# Altium PCB DIOT_Sampler 20spacin.PCBDOC (part 7 of 8)
Units mm, origin at the board's own origin, x right, y up, seen from the top; angles counter-clockwise.
Board outline 222.37 x 100 mm, 4 copper layers (Top, GP1(GND), L3, Bot), stack 1.648 mm thick; 680 components, 424 nets, 2212 pads, 808 vias.
Unrouted connection lines stored in the file: 327.
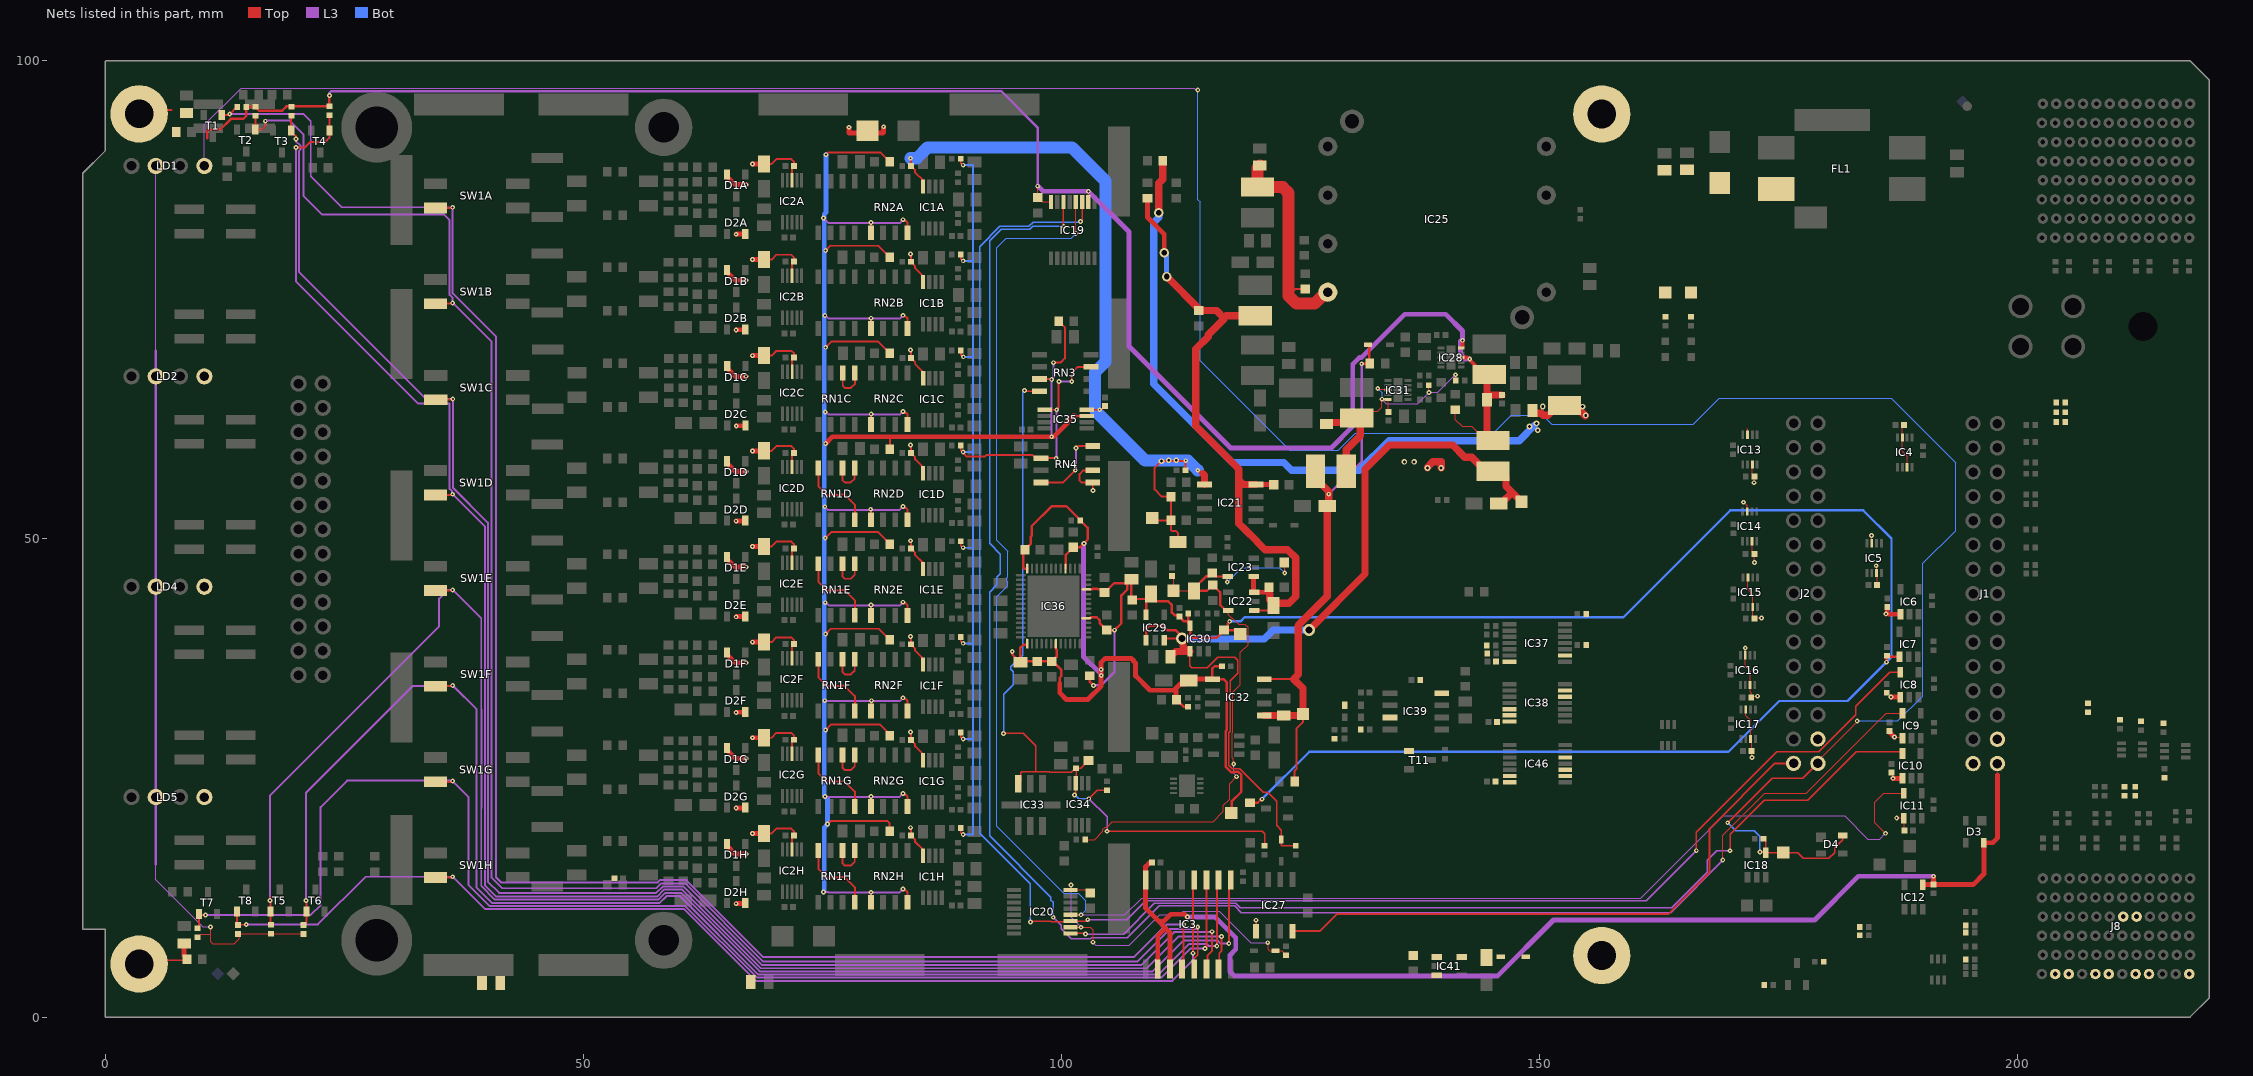
[diagram p8: the nets of this part, all layers, seen from the top]

## Via types
v1: diameter 0.5, hole 0.2, Top to Bot, tented both sides, 765 vias
v2: diameter 0.6, hole 0.3, Top to Bot, tented both sides, 17 vias
v3: diameter 0.5, hole 0.2, Top to Bot, 11 vias
v4: diameter 1, hole 0.6, Top to Bot, tented both sides, 7 vias
v5: diameter 0.6, hole 0.3, Top to Bot, 6 vias
v6: diameter 1.27, hole 0.711, Top to Bot, 2 vias

## Nets (pads, with @x,y where several pads share a name; then routed paths per layer and width w, separated by ;. In a path a pad name is that pad's centre, name@x,y a point inside that pad or via, vN(x,y) a via of type N, cw(c..) or ccw(c..) an arc to the next point about the centre after c; other vN are vias at no path point) (continued)
NetRN1C_5: RN1C.5 RN1C.6 | length 4
  Top w0.203: RN1C.6@77.141,67.363 77.141,66.022 77.377,65.786 78.002,65.786 78.411,66.196 RN1C.5@78.411,67.363
NetRN1D_4: RN1D.4 RN1D.8 | length 8.1
  Top w0.203: RN1D.8@74.594,57.31 74.594,55.515 75.499,54.61 76.867,54.61 76.916,54.659 77.312,54.659 78.404,53.567 RN1D.4@78.404,51.91
NetRN1D_5: RN1D.5 RN1D.6 | length 4
  Top w0.203: RN1D.6@77.114,57.48 77.114,56.138 77.35,55.903 77.975,55.903 78.384,56.312 RN1D.5@78.384,57.48
NetRN1E_4: RN1E.4 RN1E.8 | length 8.1
  Top w0.203: RN1E.8@74.594,47.31 74.594,45.515 75.499,44.61 76.867,44.61 76.916,44.659 77.312,44.659 78.404,43.567 RN1E.4@78.404,41.91
NetRN1E_5: RN1E.5 RN1E.6 | length 4
  Top w0.203: RN1E.6@77.128,47.407 77.128,46.066 77.364,45.83 77.989,45.83 78.398,46.239 RN1E.5@78.398,47.407
NetRN1F_4: RN1F.4 RN1F.8 | length 8.1
  Top w0.203: RN1F.8@74.594,37.31 74.594,35.515 75.499,34.61 76.867,34.61 76.916,34.659 77.312,34.659 78.404,33.567 RN1F.4@78.404,31.91
NetRN1F_5: RN1F.5 RN1F.6 | length 4
  Top w0.203: RN1F.6@77.128,37.407 77.128,36.066 77.364,35.83 77.989,35.83 78.398,36.239 RN1F.5@78.398,37.407
NetRN1G_4: RN1G.4 RN1G.8 | length 8.1
  Top w0.203: RN1G.8@74.594,27.31 74.594,25.515 75.499,24.61 76.867,24.61 76.916,24.659 77.312,24.659 78.404,23.567 RN1G.4@78.404,21.91
NetRN1G_5: RN1G.5 RN1G.6 | length 4
  Top w0.203: RN1G.6@77.128,27.407 77.128,26.066 77.364,25.83 77.989,25.83 78.398,26.239 RN1G.5@78.398,27.407
NetRN1H_4: RN1H.4 RN1H.8 | length 8.1
  Top w0.203: RN1H.8@74.594,17.31 74.594,15.515 75.499,14.61 76.867,14.61 76.916,14.659 77.312,14.659 78.404,13.567 RN1H.4@78.404,11.91
NetRN1H_5: RN1H.5 RN1H.6 | length 4
  Top w0.203: RN1H.6@77.128,17.407 77.128,16.066 77.364,15.83 77.989,15.83 78.398,16.239 RN1H.5@78.398,17.407
NetRN4_1: RN4.1 RN4.2 | length 4.5
  Top w0.203: RN4.2@103.289,57.17 102.304,57.17 101.914,56.78 101.914,56.08 102.094,55.9 RN4.1@103.289,55.9 103.289,55.08 v1(103.314,55.055)
NetRN4_4: RN4.4 RN4.8 | length 8.3
  Top w0.203: RN4.8@97.889,55.9 100.184,55.9 v1(101.464,57.18) ; v1(101.539,59.505) 101.744,59.71 RN4.4@103.289,59.71
  L3 w0.203: v1(101.464,57.18) 101.539,57.255 v1(101.539,59.505)
P2V5A: C16.2 C71.2 C75.2 C76.2 C77.1 C92.2 C93.2 C94.2 IC7.1 IC29.5 IC30.5 IC36.31 IC36.37 R70.2 R76.1 R77.1 TP10.1 | length 207.6
  Top w0.254: IC36.31@102.609,41.715 102.964,41.715 103.06,41.811 103.703,41.811 103.998,41.516 103.998,41.221 C93.2@104.764,40.455 v1(105.564,40.455) 106.283,41.174 106.283,44.09 106.899,44.705 C94.2@106.899,45.357 ; IC36.37@102.609,44.715 103.25,44.715 103.33,44.796 103.748,44.796 103.828,44.715 104.179,44.715 C92.2@104.514,44.38 104.539,44.38 105.516,45.357 C94.2@106.899,45.357 ; R77.1@102.964,35.705 102.964,35.08 v1(103.364,34.68) ; IC29.5@108.864,42.082 108.864,43.446 C77.1@109.387,43.969 ; R70.2@113.294,42.18 IC30.5@113.294,41.38 ; v1(117.602,41.38) 117.602,41.313 117.387,41.098 117.387,40.803 C75.2@117.039,40.455 ; TP10.1@118.706,40.07 118.321,40.455 C75.2@117.039,40.455 ; R76.1@119.729,22.414 120.544,22.414 120.916,22.786 v1(120.982,22.786) ; v1(186.29,37.112) 186.333,37.154 C16.2@186.333,37.784 186.418,37.698 IC7.1@187.657,37.698 ; C94.2@106.899,45.357 C94.2@107.322,45.78 107.322,43.715 108.889,43.715 109.387,44.213 C77.1@109.387,44.244 C77.1@109.387,43.969 ; C77.1@109.387,43.969 109.885,43.471 111.187,43.471 111.568,43.091 111.568,42.299 111.843,42.024 112.189,42.024 C76.2@112.341,41.872 112.833,41.38 IC30.5@113.294,41.38 ; IC30.5@113.294,41.38 113.294,41.1 IC30.5@113.465,40.929 113.465,39.979 113.764,39.68 116.264,39.68 C75.2@117.039,40.455
  L3 w0.254: v1(103.364,34.68) 104.164,34.68 105.564,36.08 v1(105.564,40.455)
  Bot w0.254: v1(117.602,41.38) 118.739,41.38 119.164,41.805 158.78,41.805 169.955,52.98 183.858,52.98 186.81,50.027 186.81,37.632 v1(186.29,37.112) 182.226,33.047 175.077,33.047 169.766,27.737 125.933,27.737 v1(120.982,22.786)
P3V3: C17.2 C18.2 C19.2 C20.2 C21.2 C22.2 C23.2 C25.2 C26.2 C27.2 C28.2 C29.2 C30.2 C32.2 C33.2 C69.2 C70.2 C123.2 D9.1 IC4.3 IC4.7 IC5.3 IC5.7 IC6.1 IC8.1 IC9.1 IC10.1 IC11.1 IC13.3 IC13.7 IC14.3 IC14.7 IC15.3 IC15.7 IC16.3 IC16.7 IC17.3 IC17.7 IC19.10 IC19.16 IC20.10 IC20.16 IC27.5 IC28.8 IC28.10 IC46.14 L7.2 L8.1 LD1.2 LD1.4 LD2.2 LD2.4 LD3.2 LD4.2 LD4.4 LD5.2 LD5.4 R25.1 R27.1 R29.1 R31.1 R33.1 R36.1 R39.1 R43.1 R65.1 R66.2 R119.2 TP15.1 | length 374.6
  Top w0.127: R39.1@9.764,8.46 9.984,8.68 11.064,8.68 ; v1(11.014,9.43) 11.064,9.38 11.064,8.68 ; R36.1@20.764,8.71 14.014,8.71 14.014,8.18 13.514,7.68 11.264,7.68 11.064,7.88 11.064,8.68 ; v1(97.527,86.886) C32.2@97.527,85.686 97.966,85.247 IC19.16@98.924,85.247 ; IC20.10@100.969,9.387 v1(102.071,9.387) 103.007,9.387 103.339,9.055 103.339,7.855 v1(103.314,7.83) ; v1(101.014,13.812) 101.014,13.332 IC20.16@100.969,13.287 102.707,13.287 C33.2@103.014,12.98 ; IC19.10@102.824,85.247 v1(102.824,86.349) ; v1(121.589,7.78) 121.629,7.74 121.629,7.065 121.764,6.93 D9.1@122.404,6.93 123.044,6.93 R65.1@123.514,6.46 ; R66.2@141.647,63.133 141.261,63.52 R66.2@141.211,63.52 141.211,62.459 141.915,61.755 142.914,61.755 144.391,60.279 145.137,60.279 L8.1@145.141,60.279 ; v1(171.336,53.831) 171.726,53.441 IC14.7@171.726,52.851 ; v1(171.516,38.596) IC16.7@171.516,37.838 171.512,37.834 171.512,36.67 172.016,36.166 IC16.3@172.016,34.738 172.016,34.013 172.144,33.885 C25.2@172.144,33.434 172.261,33.551 v1(172.802,33.551) ; IC17.7@171.571,32.166 171.571,31.516 172.071,31.016 IC17.3@172.071,29.066 172.188,28.949 C27.2@172.188,27.838 172.188,27.174 v1(172.221,27.141) ; 171.676,61.589 171.76,61.505 IC13.7@171.76,60.889 ; IC15.7@171.802,45.976 171.798,45.972 171.798,44.731 172.302,44.227 IC15.3@172.302,42.876 172.302,41.841 C26.2@172.469,41.673 172.528,41.731 v1(173.227,41.731) ; IC14.3@172.226,49.751 172.226,48.66 C30.2@172.464,48.421 172.478,48.407 v1(172.478,47.537) ; IC13.3@172.26,57.789 172.26,56.738 C28.2@172.474,56.524 172.474,55.931 v1(172.426,55.883) ; IC5.7@184.75,49.543 v1@184.75,50.364 ; v1(185.212,47.193) 185.25,47.155 IC5.3@185.25,46.443 185.318,46.375 C22.2@185.318,45.18 ; C19.2@186.805,25.555 186.965,25.715 v1(186.965,24.962) ; v1(187.112,29.271) 187.836,29.271 IC9.1@187.962,29.146 IC9.1@187.917,29.101 ; v1(187.354,20.821) 188.05,20.821 IC11.1@188.085,20.786 188.167,20.704 C18.2@188.167,19.487 ; C23.2@187.95,61.716 IC4.3@187.95,60.598 187.95,59.15 188.45,58.65 IC4.7@188.45,57.498
  Top w0.152: IC27.5@120.359,8.98 120.364,8.985 v1(120.364,10.13)
  Top w0.254: 10.685,91.879 10.685,92.66 10.834,92.809 12.046,92.809 13.163,93.926 14.46,93.926 14.789,94.255 14.789,95.125 R25.1@14.759,95.155 ; R25.1@14.759,95.175 R27.1@15.714,95.175 16.11,94.779 18.513,94.779 18.959,95.225 R31.1@23.464,95.225 v1(23.464,96.355)
  Top w0.381: IC28.8@141.812,68.965 142.455,68.965 ; IC28.10@141.812,69.965 141.948,70.1 v1(141.948,70.765) ; v1@142.655,68.765 144.235,67.185 L7.2@144.735,67.185
  Top w0.508: v1(186.24,42.162) v1@186.365,42.287 ; C17.2@186.365,42.862 v1@186.365,42.287 ; C20.2@186.615,29.912 186.615,29.767 v1(187.112,29.271) ; v1(186.77,33.458) IC8.1@187.725,33.458 ; v1(186.965,24.962) 186.968,24.959 IC10.1@187.95,24.959 ; IC6.1@187.743,42.122 186.53,42.122 v1@186.365,42.287
  Top w0.762: v2(138.296,57.422) 138.296,57.5 138.85,58.055 139.719,58.055 v2(139.719,57.422) ; L7.2@144.735,67.185 144.518,66.967 C70.2@144.518,64.568 ; L8.1@145.137,60.279 144.518,60.898 C70.2@144.518,64.568 ; L8.1@145.141,60.279 L8.1@145.891,60.279 ; C69.2@146.082,65.044 144.993,65.044 C70.2@144.518,64.568
  L3 w0.127: 5.304,15.97 5.304,14.359 10.233,9.43 v1(11.014,9.43) ; 5.304,69.68 LD1.2@5.304,89.68 ; v1(101.014,13.812) 101.014,10.534 100.969,10.489 v1(102.071,9.387) ; v1(103.314,7.83) 103.62,7.524 107.093,7.524 110.271,10.703 112.358,10.703 112.736,11.08 116.489,11.08 119.789,7.78 v1(121.589,7.78)
  L3 w0.254: 5.304,15.97 LD5.2@5.304,23 5.304,69.68 ; v1(23.464,96.355) 23.464,96.63 23.657,96.823 93.721,96.823 97.527,93.017 v1(97.527,86.886)
  L3 w0.508: v1@97.542,86.902 98.095,86.349 v1(102.824,86.349) 107.083,82.09 107.083,70.119 117.697,59.505 128.214,59.505 130.48,61.771 130.48,68.281 131.149,68.951 131.379,68.951 135.913,73.485 140.201,73.485 141.948,71.737 v1(141.948,70.765) ; v1@141.751,70.728 141.751,69.303 142.227,68.827 142.703,68.827 v1(142.711,68.82)
  other v1: 184.71,50.364
  other v2: 135.869,58.055 136.898,58.055
P3V3_DIOT: C107.2 C108.2 C110.2 C118.1 D17.2 IC37.2 IC37.14 IC38.14 IC39.8 IC41.5 R102.2 R103.2 R104.1 R107.1 R109.1 R110.1 R113.1
P3V3_MP: C113.2 C119.2 C120.2 D17.1 IC40.8 IC42.8 IC43.8 J1.30 R114.2 R115.2
P3V3_MP0: C15.2 C24.2 D3.4 IC3.2 IC3.3 IC3.16 IC12.4 | length 128
  Top w0.508: C15.2@109.489,16.18 109.271,16.18 108.819,15.728 IC3.16@108.819,14.33 108.819,11.375 110.189,10.005 ; IC3.2@110.089,5.03 110.089,8.505 110.889,9.305 ; IC3.3@111.359,5.03 111.359,8.835 110.889,9.305 ; v1(113.189,10.455) 112.889,10.755 111.464,10.755 110.714,10.005 110.189,10.005 ; IC12.4@190.123,13.556 190.077,13.602 IC12.4@190.077,13.852 190.08,13.848 C24.2@191.21,13.848 ; v1(191.21,14.72) C24.2@191.21,13.848 ; 197.882,25.319 197.882,18.695 197.413,18.225 D3.4@196.471,18.225 196.471,14.959 195.359,13.848 C24.2@191.21,13.848 ; 110.189,10.005 110.889,9.305
  L3 w0.508: v1(113.189,10.455) 116.089,10.455 118.239,8.305 118.239,7.08 117.639,6.48 117.639,4.755 118.114,4.28 145.6,4.28 151.47,10.15 178.77,10.15 183.34,14.72 v1(191.21,14.72)
P3V3_MP1: C31.2 D4.4 IC18.4 LD3.4 TP5.1 | length 295.8
  Top w0.127: 179.112,26.526 179.112,26.754 183.22,30.863 v1(183.22,30.964)
  Top w0.152: v1(169.678,20.318) 174.319,24.959 177.545,24.959 179.112,26.526 ; v1(173.046,17.263) 173.6,17.263 IC18.4@173.664,17.198 ; C31.2@173.414,18.648 173.664,18.398 IC18.4@173.664,17.198 ; D4.4@181.737,18.995 181.737,18.527 180.859,17.649 180.859,17.205 180.241,16.587 177.601,16.587 177.01,17.178 173.684,17.178 IC18.4@173.664,17.198
  L3 w0.127: 10.384,89.68 10.384,93.3 14.225,97.141 113.902,97.141 114.03,97.012 114.205,97.012 v1(114.277,96.941)
  Bot w0.127: v1(114.277,96.941) 114.277,85.48 114.514,85.243 114.514,68.63 123.864,59.28 128.951,59.28 130.726,61.055 145.173,61.055 147.038,62.92 150.339,62.92 151.293,61.966 166.061,61.966 168.795,64.7 186.795,64.7 193.507,57.988 193.507,50.875 190.072,47.44 190.072,33.567 187.469,30.964 v1(183.22,30.964)
  Bot w0.152: v1(169.678,20.318) 170.509,19.487 172.453,19.487 173.046,18.894 v1(173.046,17.263)
P3V3_MP2: C121.2 C122.2 IC44.8 IC45.8 J2.30
P3V3A: C67.1 C68.2 D7.1 IC29.1 IC29.3 IC30.1 L8.2 R60.2 TP11.1 | length 98.2
  Top w0.152: IC30.1@113.465,38.229 113.439,38.204 113.439,36.744 113.653,36.53 115.265,36.53 116.365,37.63 118.139,37.63 118.439,37.33 118.439,35.97 117.647,35.178 117.647,29.885 117.511,29.748 117.511,26.353 117.893,25.97 118.657,25.97 121.119,23.509 121.56,23.509 122.51,22.559 122.51,20.034 123.014,19.53 D7.1@123.014,18.57 123.014,17.93 123.044,17.9 R60.2@124.514,17.9
  Top w0.254: IC29.1@108.864,39.382 108.864,40.544 109.251,40.931 110.607,40.931 111.108,40.43 111.995,40.43 112.629,39.796 v6(112.629,39.585) 110.912,39.585 110.764,39.437 IC29.3@110.764,39.382
  Top w0.762: C68.2@111.414,37.68 111.963,38.229 112.939,38.229 ; v6(112.629,39.585) 112.726,39.487 112.726,38.748 112.939,38.535 112.939,38.229 ; IC30.1@113.465,38.229 112.939,38.229 ; v6(125.915,40.482) 131.766,46.332 131.766,57.276 134.32,59.83 140.9,59.83 142.181,58.549 142.92,58.549 144.391,57.079 L8.2@145.141,57.079 145.891,57.079 146.51,56.46 146.51,55.498 147.128,54.88 ; C67.1@145.739,53.714 146.014,53.714 147.128,54.827 147.128,54.88 ; TP11.1@148.128,53.88 147.128,54.88
  Bot w0.762: v6(112.629,39.585) 112.684,39.53 121.211,39.53 122.163,40.482 v6(125.915,40.482)
P5V0A: C82.2 C83.2 C84.1 C87.2 C88.2 C89.2 C90.2 C91.2 IC32.1 IC36.15 IC36.21 IC36.44 IC36.52 R73.2 R78.2 TP13.1 | length 90.4
  Top w0.254: v1(94.864,38.23) 94.864,37.915 95.672,37.107 C91.2@95.725,37.107 ; C90.2@96.035,48.88 96.035,46.959 96.104,46.89 IC36.52@96.434,46.89 ; C90.2@96.189,48.88 96.814,49.505 96.814,50.23 96.914,50.33 96.914,51.33 99.014,53.43 100.514,53.43 101.984,51.96 R78.2@101.984,51.93 102.768,51.146 102.768,49.934 v1(102.366,49.532) 101.964,49.13 C88.2@101.264,49.13 100.464,48.33 100.464,46.92 IC36.44@100.434,46.89 ; IC36.15@96.434,39.04 96.324,38.93 96.014,38.93 95.725,38.641 C91.2@95.725,37.107 ; IC36.21@99.434,39.04 99.434,38.498 99.514,38.417 99.514,37.697 99.068,37.251 C87.2@99.002,37.185 ; 99.839,34.908 99.839,35.48 100.014,35.655 100.014,36.305 99.134,37.185 C87.2@99.002,37.185 ; C82.2@112.064,33.18 112.784,32.46 R73.2@113.264,32.46 ; C83.2@116.814,36.68 116.014,36.68 115.764,36.43 115.764,35.385 IC32.1@115.814,35.335 116.97,35.335 117.317,34.988 117.317,30.022 117.181,29.885 117.181,26.216 117.808,25.589 118.052,25.589 118.103,25.64 118.52,25.64 118.816,25.345 118.816,23.552 117.808,22.544 117.808,21.373 TP13.1@117.776,21.342 ; C91.2@95.725,37.107 95.803,37.185 C89.2@97.503,37.185 C87.2@99.002,37.185
  Top w0.508: 99.839,34.908 99.839,33.9 100.534,33.205 102.781,33.205 104.167,34.591 104.167,35.729 v1(104.167,36.337) 104.167,37.083 104.595,37.511 107.322,37.511 107.545,37.288 107.545,37.224 107.764,37.005 107.764,35.68 109.27,34.174 111.772,34.174 111.995,34.397 ; C82.2@112.064,33.18 111.995,33.249 111.995,34.174 111.995,34.397 ; IC32.1@115.814,35.335 113.469,35.335 112.943,34.809 112.407,34.809 111.995,34.397
  L3 w0.508: v1(102.366,49.532) 102.314,49.48 102.314,37.69 104.167,35.837 v1@104.167,35.68
  other v1: 104.177,35.729
P6V0: C78.2 C79.2 IC31.8 IC31.10 L9.2 L10.1 R69.2 R72.2 | length 28.2
  Top w0.127: L9.2@131.117,62.663 131.117,63.34 133.093,63.34 133.52,63.767 v1@133.52,64.529 ; v1(133.093,65.72) 133.164,65.648 133.799,65.648 133.811,65.637 133.811,65.605 134.126,65.605 IC31.8@134.161,65.57 ; v1@133.779,64.57 IC31.10@134.161,64.57 134.161,63.27 C78.2@134.211,63.27 ; R72.2@138.431,66.07 138.431,65.35 v1(138.461,65.32) ; v1(141.211,67.165) 141.241,67.135 R69.2@141.241,66.57
  Top w0.762: C79.2@127.731,62.02 127.875,62.164 130.265,62.164 L9.2@130.746,62.645 ; L10.1@129.796,57.08 129.796,59.329 131.264,60.797 131.264,62.479 L9.2@131.099,62.645
  L3 w0.127: v1@133.561,64.57 133.976,64.154 137.295,64.154 v1(138.461,65.32) 139.366,65.32 v1(141.211,67.165)
  Bot w0.127: v1(133.093,65.72) 133.546,65.267 v1(133.546,64.608)
P6V0A: C80.1 C81.2 D8.1 IC32.5 IC32.8 L10.2 R53.2 R64.2 TP12.1 | length 60
  Top w0.203: IC32.8@121.214,35.335 124.08,35.335 ; R53.2@124.389,24.63 124.389,25.73 124.589,25.93 124.589,30.155 125.264,30.83 TP12.1@125.264,31.68
  Top w0.254: v1(131.411,68.32) R64.2@132.218,68.32 ; D8.1@132.071,70.32 132.115,70.32 132.218,70.217 132.218,68.388 R64.2@132.261,68.345
  Top w0.762: IC32.5@121.214,31.525 C81.2@123.264,31.525 ; C81.2@123.264,31.53 C81.2@123.264,31.525 ; L10.2@126.596,57.08 126.596,56.324 127.964,54.956 v1(127.964,54.68) 127.964,53.58 C80.1@127.814,53.43 ; C80.1@127.814,53.186 127.814,43.997 124.772,40.955 124.772,35.81 124.297,35.335 125.264,34.368 TP12.1@125.264,31.68 125.109,31.525 C81.2@123.264,31.525
  L3 w0.254: v1(127.964,54.68) 131.411,58.127 v1(131.411,68.32)
P12V0: C57.2 C114.2 C115.2 D16.1 FL1.2 IC27.8 J1.28 J1.29 J2.28 J2.29 L4.1 R45.2 R100.2 R118.2 R154.2 R155.2 R156.2 TP14.1 | length 138.3
  Top w0.203: IC27.8@124.169,8.98 127.025,8.98 128.815,10.77 163.45,10.77 167.8,15.12 167.8,19.7 174.626,26.526 J2.29@176.572,26.526
  Top w0.762: v4(110.189,84.105) 110.189,87.18 110.614,87.605 R45.2@110.614,89.53 ; C57.2@149.274,63.422 149.274,63.286 149.418,63.142 150.18,63.142 150.405,62.917 150.902,62.917 151.249,63.263 151.249,63.326 151.868,63.945 L4.1@152.618,63.945 153.718,63.945 v2@154.793,62.87
  Bot w0.762: v4(110.189,84.105) 110.189,83.605 109.664,83.08 109.664,66.205 117.889,57.98 123.264,57.98 124.064,57.18 131.164,57.18 134.263,60.279 147.888,60.279 149.464,61.855
  other v2: 149.814,61.355 148.964,61.755 149.689,62.08 154.843,62.92 154.489,63.83 150.339,63.855
P12V0_DIOT: C117.2 IC41.1 IC41.3 J8.A1 J8.D1 J8.E1 J8.G1 J8.H1 J8.J1 J8.K1 R100.1 R154.1 R155.1 R156.1
P12V0A: C8A.1 C8B.1 C8C.1 C8D.1 C8E.1 C8F.1 C8G.1 C8H.1 C9A.2 C9B.2 C9C.2 C9D.2 C9E.2 C9F.2 C9G.2 C9H.2 C13A.2 C13B.2 C13C.2 C13D.2 C13E.2 C13F.2 C13G.2 C13H.2 C38.1 C39.2 C40.2 C104.2 D1A.2 D1B.2 D1C.2 D1D.2 D1E.2 D1F.2 D1G.2 D1H.2 D2A.2 D2B.2 D2C.2 D2D.2 D2E.2 D2F.2 D2G.2 D2H.2 D5.1 IC1A.8 IC1B.8 IC1C.8 IC1D.8 IC1E.8 IC1F.8 IC1G.8 IC1H.8 IC2A.8 IC2B.8 IC2C.8 IC2D.8 IC2E.8 IC2F.8 IC2G.8 IC2H.8 IC21.1 IC35.8 R51.2 TP7.1 | length 193.6
  Top w0.203: C8H.1@68.899,19.208 69.699,19.208 70.202,19.711 71.769,19.711 72.035,19.445 C9H.2@72.035,18.998 71.845,18.808 IC2H.8@71.845,17.517 ; C8G.1@68.899,29.208 69.699,29.208 70.202,29.711 71.769,29.711 72.035,29.445 C9G.2@72.035,28.998 71.845,28.808 IC2G.8@71.845,27.517 ; C8F.1@68.899,39.208 69.699,39.208 70.202,39.711 71.769,39.711 72.035,39.445 C9F.2@72.035,38.998 71.845,38.808 IC2F.8@71.845,37.517 ; C8E.1@68.899,49.208 69.699,49.208 70.202,49.711 71.769,49.711 72.035,49.445 C9E.2@72.035,48.998 71.845,48.808 IC2E.8@71.845,47.517 ; C8D.1@68.899,59.208 69.699,59.208 70.202,59.711 71.769,59.711 72.035,59.445 C9D.2@72.035,58.998 71.845,58.808 IC2D.8@71.845,57.517 ; C8B.1@68.899,79.208 69.699,79.208 70.202,79.711 71.769,79.711 72.035,79.445 C9B.2@72.035,78.998 71.845,78.808 IC2B.8@71.845,77.517 ; C8A.1@68.899,89.208 69.699,89.208 70.202,89.711 71.769,89.711 72.035,89.445 C9A.2@72.035,88.998 71.845,88.808 IC2A.8@71.845,87.517 ; C8C.1@68.911,69.164 69.711,69.164 70.215,69.667 71.782,69.667 72.048,69.401 C9C.2@72.048,68.954 71.858,68.764 IC2C.8@71.858,67.473 ; v1(84.214,19.805) 84.264,19.755 C13H.2@84.264,18.98 84.714,18.53 84.714,18.305 85.539,17.48 IC1H.8@85.539,16.859 ; v1(84.214,29.805) 84.264,29.755 C13G.2@84.264,28.98 84.714,28.53 84.714,28.305 85.539,27.48 IC1G.8@85.539,26.859 ; v1(84.214,39.805) 84.264,39.755 C13F.2@84.264,38.98 84.714,38.53 84.714,38.305 85.539,37.48 IC1F.8@85.539,36.859 ; v1(84.214,49.805) 84.264,49.755 C13E.2@84.264,48.98 84.714,48.53 84.714,48.305 85.539,47.48 IC1E.8@85.539,46.859 ; v1(84.214,59.805) 84.264,59.755 C13D.2@84.264,58.98 84.714,58.53 84.714,58.305 85.539,57.48 IC1D.8@85.539,56.859 ; v1(84.214,79.805) 84.264,79.755 C13B.2@84.264,78.98 84.714,78.53 84.714,78.305 85.539,77.48 IC1B.8@85.539,76.859 ; v1(84.214,89.805) 84.264,89.755 C13A.2@84.264,88.98 84.714,88.53 84.714,88.305 85.539,87.48 IC1A.8@85.539,86.859 ; v1(84.227,69.761) 84.277,69.711 C13C.2@84.277,68.936 84.727,68.486 84.727,68.261 85.552,67.436 IC1C.8@85.552,66.815 ; IC35.8@102.664,63.505 v1(104.014,63.505) 104.189,63.505 C104.2@104.589,63.905 ; TP7.1@109.514,52.18 109.764,51.93 C40.2@111.464,51.93 ; C38.1@112.214,49.68 112.214,50.58 111.964,50.83 111.564,50.83 111.464,50.93 C40.2@111.464,51.93 ; C39.2@112.964,57.18 112.964,58.13 v2(110.464,58.13) 109.764,57.43 109.764,55.18 110.514,54.43 R51.2@111.464,54.43 C40.2@111.464,51.93 ; v1(114.264,57.18) 114.702,56.743
  Top w0.508: D1H.2@65.053,18.118 65.053,17.888 65.897,17.044 v1(67.027,17.044) ; D1G.2@65.053,28.118 65.053,27.888 65.897,27.044 v1(67.027,27.044) ; D1F.2@65.053,38.118 65.053,37.888 65.897,37.044 v1(67.027,37.044) ; D1E.2@65.053,48.118 65.053,47.888 65.897,47.044 v1(67.027,47.044) ; D1D.2@65.053,58.118 65.053,57.888 65.897,57.044 v1(67.027,57.044) ; D1B.2@65.053,78.118 65.053,77.888 65.897,77.044 v1(67.027,77.044) ; D1A.2@65.053,88.118 65.053,87.888 65.897,87.044 v1(67.027,87.044) ; D1C.2@65.066,68.074 65.066,67.844 65.909,67 v1(67.04,67) ; v1(65.998,11.854) 66.016,11.872 D2H.2@66.908,11.872 ; v1(65.998,21.854) 66.016,21.872 D2G.2@66.908,21.872 ; v1(65.998,31.854) 66.016,31.872 D2F.2@66.908,31.872 ; v1(65.998,41.854) 66.016,41.872 D2E.2@66.908,41.872 ; v1(65.998,51.854) 66.016,51.872 D2D.2@66.908,51.872 ; v1(65.998,71.854) 66.016,71.872 D2B.2@66.908,71.872 ; v1(65.998,81.854) 66.016,81.872 D2A.2@66.908,81.872 ; v1(66.01,61.81) 66.029,61.828 D2C.2@66.92,61.828 ; v1(67.705,19.203) 67.71,19.208 C8H.1@68.899,19.208 ; v1(67.705,29.203) 67.71,29.208 C8G.1@68.899,29.208 ; v1(67.705,39.203) 67.71,39.208 C8F.1@68.899,39.208 ; v1(67.705,49.203) 67.71,49.208 C8E.1@68.899,49.208 ; v1(67.705,59.203) 67.71,59.208 C8D.1@68.899,59.208 ; v1(67.705,79.203) 67.71,79.208 C8B.1@68.899,79.208 ; v1(67.705,89.203) 67.71,89.208 C8A.1@68.899,89.208 ; v1(67.718,69.159) 67.722,69.164 C8C.1@68.911,69.164 ; v1(77.79,93.048) 77.79,92.43 81.346,92.43 81.422,92.506 v1(81.422,93.099)
  Top w0.762: 114.789,56.83 114.963,56.656 IC21.1@114.963,55.684
  Bot w1.27: v1(84.214,89.805) 84.889,89.805 86.014,90.93 101.114,90.93 104.614,87.43 104.614,68.53 103.514,67.43 103.514,63.505 ; 103.727,63.218 108.752,58.192 113.002,58.192 v1(113.014,58.18) 113.264,58.18 v1(114.264,57.18)
  other v2: 111.239,58.23 112.014,58.23
P13V0: C37.2 C43.2 C47.1 C51.2 IC21.8 IC22.1 IC22.3 IC23.1 L3.2 R41.2 | length 69.8
  Top w0.254: IC22.1@120.164,42.515 121.666,42.515 122.164,43.013 C47.1@122.164,43.03
  Top w0.508: R41.2@109.014,85.63 109.014,83.623 110.764,81.873 v4(110.764,79.93) ; IC23.1@120.114,46.069 120.114,44.436 120.135,44.415 IC22.3@120.164,44.415 121.617,44.415 ; IC21.8@120.363,55.684 122.21,55.684 C37.2@122.214,55.68 ; C43.2@121.714,44.93 121.617,44.833 121.617,44.415 ; 121.789,44.243 121.617,44.415
  Top w0.762: v4(111.014,77.43) C51.2@114.477,73.968 ; C51.2@114.389,73.88 116.239,73.88 116.239,73.855 116.989,73.105 116.989,72.973 115.356,71.34 115.356,71.15 114.064,69.858 114.064,61.805 118.564,57.305 118.564,56.155 ; 117.214,73.33 L3.2@120.264,73.33 ; IC21.8@120.363,55.684 119.035,55.684 118.564,56.155 ; 121.789,44.243 121.789,43.63 122.139,43.28 123.814,43.28 124.514,43.98 124.514,48.024 123.658,48.88 121.289,48.88 120.453,49.716 120.453,49.745 119.196,51.002 119.167,51.002 118.564,51.605 118.564,56.155
  Bot w0.508: v4(110.764,79.93) 111.014,79.68 v4(111.014,77.43)
P13V0S: C48.2 IC25.7 L2.1 R56.2 | length 23.6
  Top w0.203: 123.764,75.43 124.464,76.13 R56.2@125.514,76.13
  Top w1.27: C48.2@120.764,89.03 120.514,88.78 L2.1@120.514,86.78 123.164,86.78 123.764,86.18 123.764,75.43 124.592,74.602 126.473,74.602 127.666,75.795 IC25.7@127.864,75.795
PE_CLK.CLK_N: R88.1
PE_CLK.CLK_P: R86.1
PE_CLK_N: J8.F4 R88.2
PE_CLK_P: J8.E4 R86.2
PGIA-CS: IC11.5 IC19.12 IC20.12 | length 185.7
  Top w0.127: IC20.12@100.969,10.687 v1(102.071,10.687) ; v1(101.514,81.93) 101.524,81.94 IC19.12@101.524,85.247 ; v1(186.179,19.213) 185.065,20.327 185.065,22.437 186.015,23.386 IC11.5@188.085,23.386
  L3 w0.127: v1(102.071,10.687) 106.643,10.687 108.403,12.446 159.821,12.446 160.594,12.446 161.261,13.113 169.198,21.05 181.905,21.05 184.344,18.611 185.577,18.611 v1(186.179,19.213)
  Bot w0.127: v1(101.514,81.93) 101.014,81.43 94.264,81.43 93.264,80.43 93.264,63.242 93.267,63.239 93.267,62.221 93.264,62.219 93.264,49.869 94.399,48.734 94.399,46.036 94.301,45.937 94.301,45.555 94.399,45.457 94.399,45.11 93.264,43.975 93.264,19.93 100.264,12.93 101.789,12.93 102.539,12.18 102.539,11.155 v1(102.071,10.687)
PGIA-MISO: IC10.5 IC20.9 | length 97.1
  Top w0.152: IC20.9@100.969,8.737 102.457,8.737 v1(102.514,8.68) ; v1(169.924,17.392) 169.924,19.101 173.506,22.682 178.065,22.682 183.111,27.728 187.781,27.728 IC10.5@187.95,27.559
  L3 w0.152: v1(102.514,8.68) 106.514,8.68 109.734,11.9 118.241,11.9 118.711,11.43 163.834,11.43 167.529,15.125 167.529,16.404 168.517,17.392 v1(169.924,17.392)
PGIA-MOSI: IC9.5 IC19.14 | length 187.2
  Top w0.127: v1(169.171,16.434) 169.171,19.005 173.553,23.386 177.884,23.386 186.244,31.746 IC9.5@187.962,31.746
  Top w0.152: IC19.14@100.224,85.247 100.224,82.72 v1(100.264,82.68)
  L3 w0.152: v1(99.155,10.43) 99.967,9.618 99.967,9.258 101.014,8.212 103.055,8.212 103.126,8.283 103.502,8.283 106.883,8.283 110.22,11.621 118.126,11.621 118.816,10.93 163.729,10.93 169.171,16.372 v1(169.171,16.434)
  Bot w0.152: v1(99.155,10.43) 99.155,11.989 98.906,12.238 98.906,12.538 92.489,18.955 92.489,44.43 93.264,45.205 93.264,45.996 93.624,46.357 93.624,48.413 92.489,49.548 92.489,62.539 92.492,62.542 92.492,62.918 92.489,62.921 92.489,81.155 93.735,82.401 96.71,82.401 96.989,82.68 v1(100.264,82.68)
PGIA-SCK: IC8.5 IC19.11 IC20.11 | length 190.1
  Top w0.152: v1(96.764,9.93) 96.871,10.037 98.907,10.037 98.967,9.977 100.909,9.977 IC20.11@100.969,10.037 102.621,10.037 v1(102.764,10.18) ; v1(102.014,83.18) 102.174,83.34 IC19.11@102.174,85.247 ; v1(166.4,17.4) 166.4,19.32 174.808,27.728 179.193,27.728 183.09,31.626 183.09,32.494 186.653,36.058 IC8.5@187.725,36.058
  L3 w0.152: v1(102.764,10.18) 106.85,10.18 108.849,12.179 160.705,12.179 161.179,12.179 v1(166.4,17.4)
  Bot w0.152: v1(96.764,9.93) 96.764,13.93 91.461,19.233 91.461,80.556 93.585,82.68 96.594,82.68 97.047,83.133 101.967,83.133 v1(102.014,83.18)
PSU_EN: R115.1 R116.2
REF_P1V7066: IC35.7 R7A.1 R7B.1 R7C.1 R7D.1 R7E.1 R7F.1 R7G.1 R7H.1 R83.2 RN2A.5 RN2A.8 RN2B.5 RN2B.8 RN2C.5 RN2C.8 RN2D.5 RN2D.8 RN2E.5 RN2E.8 RN2F.5 RN2F.8 RN2G.5 RN2G.8 RN2H.5 RN2H.8 RN3.7 | length 263.8
  Top w0.203: v1(75.314,50.08) 75.939,50.705 80.839,50.705 82.064,49.48 R7E.1@82.064,49.43 ; v1(75.36,30.005) 75.96,30.605 81.014,30.605 82.064,29.555 R7G.1@82.064,29.43 ; v1(75.36,40.055) 75.91,40.605 80.889,40.605 R7F.1@82.039,39.455 ; v1(75.36,70.03) 75.96,70.63 80.839,70.63 R7C.1@82.064,69.405 ; v1(75.36,80.155) 75.86,80.655 80.839,80.655 R7B.1@82.039,79.455 ; v1(75.389,90.18) 75.593,90.384 81.11,90.384 R7A.1@82.064,89.43 ; v1(75.543,20.181) 75.59,20.181 75.914,20.505 81.814,20.505 82.039,20.28 R7H.1@82.039,19.43 ; v1(80.064,53.105) 80.094,53.075 RN2D.5@80.094,52.005 ; v1(80.089,43.08) 80.094,43.075 RN2E.5@80.094,42.005 ; v1(80.089,73.08) 80.094,73.075 RN2B.5@80.094,72.005 ; v1(80.089,83.08) 80.094,83.075 RN2A.5@80.094,82.005 ; RN2H.5@80.094,12.005 v1(80.094,13.05) ; RN2G.5@80.094,22.005 v1(80.094,23.06) ; RN2F.5@80.094,32.005 80.094,33.035 v1(80.139,33.08) ; RN2C.5@80.107,61.962 80.107,63.048 v1(80.114,63.055) ; R7D.1@82.064,59.355 82.064,60.604 82.139,60.679 ; v1(83.439,13.38) 83.589,13.23 83.764,13.23 83.904,13.09 RN2H.8@83.904,12.005 ; v1(83.439,23.38) 83.589,23.23 83.764,23.23 83.904,23.09 RN2G.8@83.904,22.005 ; v1(83.439,33.38) 83.589,33.23 83.764,33.23 83.904,33.09 RN2F.8@83.904,32.005 ; v1(83.439,43.38) 83.589,43.23 83.764,43.23 83.904,43.09 RN2E.8@83.904,42.005 ; v1(83.439,53.38) 83.589,53.23 83.764,53.23 83.904,53.09 RN2D.8@83.904,52.005 ; v1(83.439,73.38) 83.589,73.23 83.764,73.23 83.904,73.09 RN2B.8@83.904,72.005 ; v1(83.439,83.38) 83.589,83.23 83.764,83.23 83.904,83.09 RN2A.8@83.904,82.005 ; v1(83.452,63.336) 83.602,63.186 83.777,63.186 83.917,63.046 RN2C.8@83.917,61.962 ; RN3.7@97.714,66.72 98.949,66.72 v1(98.989,66.68) ; v1(99.189,68.43) 99.914,68.43 100.364,68.88 100.364,72.13 R83.2@99.714,72.78 ; 101.412,62.855 IC35.7@102.664,62.855
  Top w0.508: v1(75.36,59.98) 76.059,60.679 82.139,60.679 99.188,60.679 100.708,62.199 100.708,62.366 101.197,62.855 101.412,62.855
  L3 w0.203: v1(75.139,13.08) 75.614,13.08 75.664,13.03 83.089,13.03 v1(83.439,13.38) ; v1(75.139,83.555) 75.664,83.03 83.089,83.03 v1(83.439,83.38) ; v1(75.264,33.08) 75.314,33.03 83.089,33.03 v1(83.439,33.38) ; v1(75.268,53.358) 75.595,53.03 83.089,53.03 v1(83.439,53.38) ; v1(75.293,23.056) 75.319,23.03 83.089,23.03 v1(83.439,23.38) ; v1@75.302,73.392 75.664,73.03 83.089,73.03 v1(83.439,73.38) ; v1@75.349,63.314 75.677,62.986 83.102,62.986 v1(83.452,63.336) ; v1@75.363,43.377 75.71,43.03 83.089,43.03 v1(83.439,43.38) ; v1(98.989,60.68) v1(98.989,66.68) 99.189,66.88 v1(99.189,68.43)
  Bot w0.508: v1(75.139,13.08) 75.208,13.149 75.208,19.816 75.543,20.151 v1(75.543,20.181) 75.543,22.806 v1(75.293,23.056) 75.208,23.141 75.208,29.853 v1(75.36,30.005) 75.208,30.157 75.208,50.08 75.208,59.828 v1(75.36,59.98) 75.208,60.132 75.208,70.03 75.208,83.966 75.389,84.147 v1(75.389,90.18)
  other v1: 75.318,43.332 75.318,63.283 75.268,73.359
REF_P2V048: IC35.1 R13A.1 R13B.1 R13C.1 R13D.1 R13E.1 R13F.1 R13G.1 R13H.1 RN3.3 RN4.6 | length 108.4
  Top w0.203: R13H.1@89.484,19.755 89.484,19.285 89.714,19.055 v1(89.739,19.08) ; R13G.1@89.484,29.755 89.484,29.285 89.714,29.055 v1(89.739,29.08) ; R13F.1@89.484,39.755 89.484,39.285 89.714,39.055 v1(89.739,39.08) ; R13E.1@89.484,49.755 89.484,49.285 89.714,49.055 v1(89.739,49.08) ; R13D.1@89.484,59.755 89.484,59.285 89.97,58.799 89.97,58.737 90.104,58.603 92.012,58.603 92.189,58.78 96.939,58.78 97.279,58.44 RN4.6@97.889,58.44 99.454,58.44 v1(99.464,58.43) ; R13B.1@89.484,79.755 89.484,79.285 89.714,79.055 v1(89.739,79.08) ; R13A.1@89.484,89.755 89.484,89.285 89.714,89.055 v1(89.739,89.08) ; R13C.1@89.497,69.711 89.497,69.241 89.727,69.011 v1(89.752,69.036) ; IC35.1@98.264,63.505 v1(99.514,63.505) 99.714,63.705 99.714,66.405 v1(99.764,66.455) ; v1(101.089,66.455) 101.089,67.38 101.699,67.99 RN3.3@103.114,67.99
  L3 w0.203: v1(99.464,58.43) 99.514,58.48 v1(99.514,63.505) ; v1(99.764,66.455) v1(101.089,66.455)
  Bot w0.203: v1@89.803,19.076 90.764,19.076 90.764,29.076 ; v1@89.803,29.076 90.764,29.076 ; v1@89.803,39.076 90.764,39.076 ; v1@89.803,49.076 90.764,49.076 ; v1@89.803,59.076 90.764,59.076 ; v1@89.803,79.076 90.764,79.076 ; v1@89.803,89.076 90.764,89.076 90.764,79.076 ; v1@89.816,69.032 90.764,69.032 ; 90.764,29.076 90.764,39.076 ; 90.764,39.076 90.764,49.076 ; 90.764,49.076 90.764,59.076 ; 90.764,59.076 90.764,69.032 ; 90.764,69.032 90.764,79.076
  other v1: 89.739,59.08
REF_P4V096: C100.2 IC33.7 IC34.7 R59.1 R81.1 R82.2 RN3.8 | length 82.7
  Top w0.152: v1(93.964,29.655) 95.997,29.655 97.3,28.352 97.3,25.626 ; IC33.7@95.494,24.384 95.768,24.658 95.768,25.537 95.857,25.626 97.3,25.626 ; v1(96.139,65.53) 96.219,65.45 RN3.8@97.714,65.45 ; v1(101.384,23.22) 101.514,23.35 IC34.7@101.514,24.455 101.552,24.493 101.552,25.985 R81.1@101.518,26.018 ; C100.2@102.839,26.83 102.814,26.83 102.415,26.431 102.415,26.406 102.027,26.018 R81.1@101.518,26.018 ; v1(102.876,22.836) 103.776,23.735 R82.2@104.789,23.735 ; v1(104.789,19.43) 121.014,19.43 121.264,19.18 121.264,18.23 ; 97.3,25.626 98.743,25.626 98.791,25.578 101.058,25.578 101.498,26.018 R81.1@101.518,26.018
  L3 w0.152: v1(102.876,22.836) 104.789,20.922 v1(104.789,19.43)
  Bot w0.152: v1(93.964,29.655) 93.964,33.746 94.967,34.749 94.967,36.118 94.725,36.359 94.725,36.616 95.964,37.855 95.964,50.239 95.967,50.242 95.967,50.618 95.964,50.621 95.964,65.355 v1(96.139,65.53) ; v1(101.384,23.22) 101.796,22.808 102.848,22.808 v1(102.876,22.836)
REF_VCC: C41.2 C42.2 C44.1 C45.2 IC22.5 IC23.5 R54.2 R80.1 TP8.1 | length 62.1
  Top w0.127: R80.1@102.522,18.563 103.472,18.563 104.349,19.44 104.349,19.612 104.607,19.871 104.78,19.871 105.336,20.427 115.862,20.427 116.951,21.516 116.951,22.136 117.596,22.781 117.596,24.42 v1(118.312,25.136) ; C45.2@111.591,46.115 111.744,45.962 TP8.1@111.744,44.573 C44.1@113.895,44.573 ; v1(117.348,45.487) 117.348,45.857 IC23.5@117.487,45.996 ; IC22.5@117.464,42.515 117.464,42.049 117.693,41.821 117.785,41.821 118.528,41.077 119.167,41.077 119.314,40.931 119.385,40.931 119.531,40.784 119.531,38.956 118.706,38.13 118.706,34.758 117.939,33.99 117.939,29.799 117.874,29.734 117.874,27.126 117.964,27.036 117.964,26.54 v1(118.032,26.473) ; C42.2@123.31,47.535 123.364,47.48 v1(123.364,46.436)
  Top w0.254: IC23.5@117.414,46.069 116.198,46.069 115.837,46.43 R54.2@115.787,46.43 115.464,46.107 115.169,46.107 113.895,44.832 113.895,44.573 C44.1@113.895,44.557 115.204,44.557 115.812,45.166 115.862,45.166 116.626,44.402 116.626,43.078 117.189,42.515 IC22.5@117.464,42.515
  L3 w0.127: v1(118.032,26.473) 118.032,25.479 118.312,25.199 v1(118.312,25.136)
  Bot w0.127: v1(117.348,45.487) 118.866,47.006 122.769,47.006 123.338,46.436 v1(123.364,46.436)
RST: IC39.3 T11.1
RSTn: D14.1 R93.1
SERVMOD_3V3: IC38.5 IC38.6 IC38.12 IC38.13 IC46.5 IC46.13 R98.1 R101.2
SHARED_BUS_0: R95.1
SHARED_BUS_1: R92.1
SHARED_BUS_2: R48.1
SHARED_BUS_3: R96.1
SHARED_BUS_4: R97.1
STRIP1: C34.1 C36.1 M1.1 M2.1 M3.1 M4.1 R46.2 R47.2 R50.2 | length 10.2
  Top w0.203: M4.1@3.57,5.942 8.452,5.942 R47.2@8.566,6.055 ; M3.1@3.57,94.842 6.977,94.842
  Top w0.508: C36.1@8.264,7.705 8.264,6.357 R47.2@8.566,6.055
STRIP2: R49.1
STRIP3: R50.1
Switch_I2C.SCL: IC46.2 R121.2
Switch_I2C.SDA: IC46.3 R120.2
TERM_STAT0: IC3.4 R25.2 SW1A.2 T1.1 | length 188.1
  Top w0.203: T1.1@12.214,94.33 12.944,94.33 v1(13.044,94.43) R25.2@13.794,95.18 ; SW1A.2@34.556,84.6 36.286,84.6 v1(36.356,84.67) ; IC3.4@112.629,5.03 112.764,5.165 v1(112.764,9.68)
  L3 w0.203: v1(13.044,94.43) 20.764,94.43 21.514,93.68 21.514,87.93 24.764,84.68 36.346,84.68 v1(36.356,84.67) 36.356,75.663 40.889,71.13 40.889,14.593 41.361,14.121 41.373,14.121 41.414,14.08 57.802,14.08 58.032,14.31 60.787,14.31 68.837,6.26 107.594,6.26 111.014,9.68 v1(112.764,9.68)
TERM_STAT1: IC3.5 R27.2 SW1B.2 T2.1 | length 186.9
  Top w0.203: R27.2@15.764,94.21 15.714,94.16 T2.1@15.714,92.83 16.439,92.83 16.764,93.155 v1(16.764,93.68) ; SW1B.2@34.556,74.6 36.286,74.6 v1(36.356,74.67) ; IC3.5@113.899,5.03 113.899,6.138 114.264,6.503 v1(114.264,9.43)
  L3 w0.203: v1(16.764,93.68) 16.854,93.77 19.264,93.77 20.773,92.261 20.773,90.595 20.764,90.586 20.764,85.837 22.696,83.905 35.464,83.905 36.026,83.343 36.026,75.526 36.356,75.196 v1(36.356,74.67) 40.414,70.612 40.414,14.58 41.526,13.468 57.657,13.468 58.169,13.979 60.65,13.979 68.831,5.798 107.918,5.798 111.321,9.201 112.566,9.201 114.035,9.201 v1(114.264,9.43)
TERM_STAT2: IC3.6 R29.2 SW1C.2 T3.1 | length 177.7
  Top w0.203: R29.2@19.514,94.21 19.464,94.16 T3.1@19.464,92.73 19.464,92.63 19.964,92.13 v1(19.964,91.83) ; SW1C.2@34.569,64.556 36.299,64.556 v1(36.369,64.626) ; IC3.6@115.169,5.03 115.264,5.125 115.264,6.43 115.764,6.93 v1(115.764,8.93)
  L3 w0.203: v1(19.964,91.83) 19.964,91.607 20.443,91.128 20.443,90.732 20.294,90.583 20.294,77.9 33.568,64.626 v1(36.369,64.626) 36.369,55.375 40.044,51.7 40.044,14.15 41.209,12.986 57.642,12.986 58.305,13.649 60.514,13.649 68.729,5.434 108.354,5.434 111.791,8.871 112.429,8.871 115.705,8.871 v1(115.764,8.93)
TERM_STAT3: IC3.7 R31.2 SW1D.2 T4.1 | length 181.6
  Top w0.203: v1(19.964,90.93) 20.864,90.93 21.439,91.505 23.039,91.505 23.464,91.93 T4.1@23.464,92.73 23.464,94.16 R31.2@23.514,94.21 ; SW1D.2@34.556,54.6 36.286,54.6 v1(36.356,54.67) ; IC3.7@116.439,5.03 116.514,5.105 116.514,6.68 116.764,6.93 v1(116.764,8.43)
  L3 w0.203: v1(19.964,90.93) 19.964,76.93 32.747,64.147 36.038,64.147 36.038,55.239 36.286,54.991 36.286,54.6 v1(36.356,54.67) 39.714,51.312 39.714,13.805 40.918,12.601 57.724,12.601 58.442,13.319 60.377,13.319 68.592,5.104 108.938,5.104 112.264,8.43 v1(116.764,8.43)
TERM_STAT4: IC3.9 R33.2 SW1E.2 T5.1 | length 168.3
  Top w0.203: R33.2@17.264,9.65 17.314,9.7 T5.1@17.314,11.03 17.314,12.43 17.264,12.48 ; SW1E.2@34.556,44.6 36.286,44.6 v1(36.356,44.67) ; v1(117.514,7.68) 117.514,14.135 IC3.9@117.709,14.33
  L3 w0.203: v1(17.264,12.18) 17.264,23.18 34.939,40.855 34.939,43.755 35.854,44.67 v1(36.356,44.67) 39.339,41.687 39.339,32.154 39.344,32.149 39.344,21.875 39.339,21.87 39.339,13.705 40.773,12.271 57.861,12.271 58.579,12.989 60.24,12.989 68.455,4.773 109.543,4.773 112.759,7.989 116.382,7.989 116.691,7.68 v1(117.514,7.68)
TERM_STAT5: IC3.10 R36.2 SW1F.2 T6.1 | length 148.1
  Top w0.203: R36.2@20.764,9.65 21.064,9.95 T6.1@21.064,11.03 21.064,12.13 v1(21.014,12.18) ; SW1F.2@34.556,34.6 36.286,34.6 v1(36.356,34.67) ; v1(116.264,7.43) 116.264,14.155 IC3.10@116.439,14.33
  L3 w0.203: v1(21.014,12.18) 21.014,23.43 32.204,34.62 36.306,34.62 v1(36.356,34.67) 38.856,32.17 38.856,13.538 40.454,11.94 57.998,11.94 58.716,12.659 60.103,12.659 68.319,4.443 110.138,4.443 113.354,7.659 115.212,7.659 115.441,7.43 v1(116.264,7.43)
TERM_STAT6: IC3.11 R39.2 SW1G.2 T7.1 | length 142.7
  Top w0.203: R39.2@9.764,9.4 9.814,9.45 T7.1@9.814,10.78 9.914,10.68 v1(10.514,10.68) ; SW1G.2@34.556,24.6 36.286,24.6 v1(36.356,24.67) ; v1(115.014,7.18) 115.169,7.335 IC3.11@115.169,14.33
  L3 w0.203: v1(10.514,10.68) 21.514,10.68 22.535,11.701 22.535,21.951 25.304,24.72 36.306,24.72 v1(36.356,24.67) 37.989,23.037 37.989,13.83 40.209,11.61 60.685,11.61 68.182,4.113 110.447,4.113 113.514,7.18 v1(115.014,7.18)
TERM_STAT7: IC3.12 R43.2 SW1H.2 T8.1 | length 119
  Top w0.203: T8.1@13.814,11.03 13.814,9.85 14.014,9.65 14.734,9.65 v1(14.764,9.68) ; SW1H.2@34.556,14.6 36.286,14.6 v1(36.356,14.67) ; v1(113.764,6.68) 113.764,14.195 IC3.12@113.899,14.33
  L3 w0.203: v1(14.764,9.68) 22.264,9.68 27.254,14.67 v1(36.356,14.67) 39.747,11.279 60.549,11.279 68.045,3.783 111.617,3.783 113.764,5.93 v1(113.764,6.68)
pads on no net: D11.5 D12.5 D18.5 FTG1.FTG2 FTG2.1 FTG3.1 FTG4.1 IC3.13 IC4.1 IC4.8 IC5.5 IC5.6 IC6.3 IC6.4 IC7.3 IC7.4 IC8.3 IC8.4 IC9.3 IC9.4 IC10.3 IC10.4 IC11.3 IC11.4 IC12.5 IC13.5 IC13.6 IC14.5 IC14.6 IC15.5 IC15.6 IC16.5 IC16.6 IC17.5 IC17.6 IC18.5 IC25.9 IC28.4 IC31.4 IC41.4 IC42.1 IC42.2 IC42.3 IC42.7 IC43.7 IC44.7 IC45.1 IC45.2 IC45.3 IC45.7 J8.B1 J8.L2 J9.A3 J9.A5 J9.A7 J9.A8 J9.B2 J9.B3 J9.B4 J9.B5 J9.B6 J9.B7 J9.B8 J9.C2 J9.C4 J9.C6 J9.C8 J9.D3 J9.D5 J9.D7 J9.D8 J9.E2 J9.E3 J9.E4 J9.E5 J9.E6 J9.E7 J9.E8 J9.F2 J9.F4 J9.F6 J9.F8 J9.G3 J9.G5 J9.G7 J9.H2 J9.H3 J9.H4 J9.H5 J9.H6 J9.H7 J9.H8 J9.I2 J9.I4 J9.I6 J9.I8 J9.J3 J9.J5 J9.J7 J9.K2 J9.K3 J9.K4 J9.K5 J9.K6 J9.K7 J9.K8 J9.L2 J9.L4 J9.L6 J9.L8 J10.5 R14.1 R14.2 R15.1 R15.2 R16.1 R16.2 R17.1 R17.2 R18.1 R18.2 R19.1 R19.2

## Polygon pours and split planes (outlines as drawn)
GND on Top "GND_L01_P034" (solid, remove dead copper, pour order 34): 202.001,52.7 202.001,46.775 219.776,46.775 219.776,52.7
no net on Top "esd1" (solid, pour order 30): 83.501,1 100.568,1 100.568,2.269 45.568,2.269 45.568,1
no net on Top "NONET_L01_P029" (solid, pour order 29): 218.101,1 218.118,1 219.358,2.24 120.568,2.24 120.568,1
no net on Top "esd1" (solid, pour order 28): 0.818,7.075 7.943,7.075 7.943,2.55 40.568,2.55 40.568,1.05 0.818,1.05
no net on Top "ML1_BAL" (solid, shelved, pour order 26): 0.344,99.73 159.464,99.73 159.464,1.13 0.638,1.13
N12V0A on Top "ML1_BAL" (solid, remove dead copper, pour order 18): 116.85,28.305 116.85,21.151 109.464,21.151 109.464,27.93 110.039,28.505 110.089,28.555 116.614,28.555
NetC52_1 on Top "Top Overlay-No Net" (solid, remove dead copper, pour order 2): 158.027,77.23 158.027,65.72 150.433,65.72 150.433,70.013 150.433,71.292 150.433,77.23
P12V0A on Top "ML1_BAL" (solid, remove dead copper, pour order 20): 116.189,55.18 116.189,56.78 114.914,58.055 114.064,58.905 109.814,58.905 109.339,58.905 108.614,58.18 108.439,58.005 108.439,53.03 108.439,51.905 109.114,51.23 110.164,50.18 110.164,49.305 110.164,49.08 110.839,48.405 112.964,48.405 113.139,48.405 113.539,48.805 113.564,48.83 113.564,50.28 113.564,54.655 113.964,55.055 114.039,55.13 116.139,55.13
GND on Bot "GND_L04_P033" (solid, remove dead copper, pour order 33): 202.001,52.7 202.001,46.775 219.776,46.775 219.776,52.7
no net on Bot "esd1" (solid, pour order 32): 83.501,1 100.568,1 100.568,2.269 45.568,2.269 45.568,1
no net on Bot "NONET_L04_P031" (solid, pour order 31): 218.101,1 218.118,1 219.358,2.24 120.568,2.24 120.568,1
no net on Bot "esd1" (solid, pour order 27): 0.818,6.49 7.943,6.49 7.943,2.55 40.568,2.55 40.568,1.05 0.818,1.05
no net on Bot "ML1_BAL" (solid, shelved, pour order 24): 0.344,99.73 159.464,99.73 159.464,1.13 0.638,1.13
P12V0 on Bot "NONET_L06_P-001" (solid, remove dead copper, pour order 25): 174.653,23.99 174.653,27.468 175.268,28.083 175.314,28.037 177.228,28.037 177.828,28.637 177.828,29.583 178.494,30.248 192.221,30.248 194.607,27.862 195.526,27.862 196.143,28.325 196.162,30.736 200.028,30.736 200.028,24.042
N12V0A on Bot "ML1_BAL" (solid, remove dead copper, pour order 4): 63.532,89.948 63.532,9.912 66.264,7.18 72.514,7.18 89.514,7.18 89.514,10.43 72.814,10.43 66.44,10.43 65.514,11.356 65.514,19.68 65.514,89.93 65.264,90.18 63.764,90.18
N12V0A on Bot "ML1_BAL" (solid, remove dead copper, pour order 10): 88.014,82.93 88.379,82.93 89.514,81.795 89.514,10.43 88.514,9.43 87.514,9.43 87.014,9.93 86.839,10.105 86.839,13.638 86.839,82.755 87.014,82.93
P12V0A on Bot "ML1_BAL" (solid, remove dead copper, pour order 6): 67.514,10.68 66.514,10.68 66.014,11.18 65.764,11.43 65.764,12.756 65.764,90.43 66.514,91.18 69.514,94.18 81.014,94.18 85.114,94.18 86.264,93.03 86.264,90.18 86.264,16.68 85.764,16.18 85.264,16.18 84.873,16.18 82.764,18.289 82.764,89.43 82.514,89.68 82.264,89.93 75.264,89.93 73.764,89.93 73.264,89.43 72.992,89.158 69.514,89.158 69.492,89.158 69.014,88.68 69.014,12.18 67.514,10.68 66.764,10.68
P3V3 on L3 "ML1_BAL" (solid, remove dead copper, pour order 12): 100.014,18.43 100.014,6.43 103.014,3.43 125.014,3.43 193.553,3.43 193.553,58.43 134.014,58.43 105.014,58.43 100.014,53.43
GND on L3 "0" (solid, remove dead copper, pour order 22): 0.303,99.955 160.339,99.955 160.339,59.805 145.239,59.805 103.814,59.805 101.564,57.555 98.939,54.93 98.939,0.905 1.489,0.905 0.677,1.717
P12V0 on L3 "ML1_BAL" (solid, remove dead copper, pour order 14): 193.553,24.112 193.553,27.447 198.228,32.106 198.228,64.812 196.778,66.262 191.228,66.262 190.228,66.262 189.228,67.262 189.228,69.262 190.228,70.262 196.528,70.262 201.228,70.262 201.228,24.112
GND on GP1(GND) (split plane): 219.529,97.789 219.529,2.211 217.828,0.51 122.195,0.51 122.195,2.5 122.186,2.549 122.158,2.59 122.117,2.618 122.068,2.627 44.371,2.627 42.158,4.84 42.117,4.868 42.068,4.877 40.068,4.877 40.019,4.868 39.978,4.84 39.95,4.799 39.941,4.75 39.941,0.51 0.51,0.51 0.51,9.2 0.501,9.3 0.472,9.395 0.424,9.484 0.361,9.561 0.284,9.624 0.195,9.672 0.1,9.701 0,9.71 -1.82,9.71 -1.82,88.034 0.361,90.214 0.424,90.292 0.472,90.38 0.501,90.476 0.51,90.575 0.51,99.49 113.777,99.49 113.777,85.386 114.027,85.136 114.027,68.136 123.683,58.48 139.414,58.48 139.414,59.905 124.008,59.905 114.777,69.136 114.777,86.75 114.777,99.49 217.828,99.49
GND on GP1(GND) (split plane): 44.228,2.41 44.256,2.391 44.269,2.382 44.318,2.373 121.941,2.373 121.941,0.51 40.195,0.51 40.195,4.623 42.015,4.623

## Keep-outs
Top:
  lines w0.1: 6.089,3.48 6.089,4.93 6.289,5.13 6.289,5.455 ; 6.089,8.555 6.089,7.255 6.289,7.055 6.289,6.53
L3:
  lines w0.1: 6.089,3.455 6.089,4.93 6.289,5.13 6.289,7.098 6.089,7.298 6.089,8.533 ; 6.339,91.955 6.339,97.405
Bot:
  lines w0.1: 6.089,3.48 6.089,4.855 6.364,5.13 6.364,6.905 6.089,7.18 6.089,8.53 ; 6.339,93.53 6.339,96.28
KeepOutLayer:
  drawing of 3481 lines, arcs and shapes, not listed

## Other copper
Top:
  rectangle net N12V0A: 110.742,24.434 111.227,24.934
  region net STRIP1: 7.674,92.552 7.674,94.955 7.171,94.955 7.171,92.552
  rectangle net STRIP1: 5.35,94.57 8.464,95.073
  rectangle net STRIP1: 4.364,5.689 8.539,6.33
  rectangle net GND: 112.464,27.88 113.014,28.18
  rectangle net GND: 123.039,44.206 123.489,44.83
  rectangle net GND: 19.214,96.205 19.764,96.655
  rectangle net GND: 85.089,92.18 85.489,92.655
  rectangle net GND: 125.639,67.205 126.1,67.63
  rectangle net P6V0: 133.711,64.42 133.847,64.713
  rectangle net P6V0: 133.736,65.42 133.886,65.72
  rectangle net NetC52_1: 138.761,69.52 139.045,70.036
  rectangle net GND: 147.214,62.472 147.639,62.905
  rectangle net GND: 142.486,63.618 142.936,64.108
  rectangle net GND: 188.903,11.071 189.378,11.521
  rectangle net NetIC36_43: 100.489,51.68 100.839,52.18
  rectangle net GND: 99.264,51.08 99.689,51.471
  rectangle net P3V3: 135.411,57.422 140.161,58.422
  rectangle net ADC_IN_P0: 42.139,88.23 50.339,91.155
  rectangle net ADC_IN_P1: 42.139,78.27 50.339,81.195
  rectangle net ADC_IN_P2: 42.152,68.186 50.352,71.111
  rectangle net ADC_IN_P3: 42.139,58.23 50.339,61.155
  rectangle net ADC_IN_P4: 42.139,48.23 50.339,51.155
  rectangle net ADC_IN_P5: 42.139,38.23 50.339,41.155
  rectangle net ADC_IN_P6: 42.139,28.23 50.339,31.155
  rectangle net ADC_IN_P7: 42.139,18.23 50.339,21.155
  rectangle net GND: 112.689,72.03 113.689,72.505
  rectangle net GND: 114.989,82.455 117.014,85.63
  rectangle net P5V0A: 103.839,35.33 104.589,36.705
  pour cut-out: 114.777,86.75 114.777,69.136 124.083,59.83 138.239,59.83 138.239,58.449 123.714,58.449 114.027,68.136 114.027,85.136 113.777,85.386 113.777,101.68 114.777,101.68
L3:
  rectangle net GND: 96.583,39.88 101.664,46.169
  rectangle net P5V0A: 103.664,35.505 104.414,36.605
  pour cut-out: 114.777,86.75 114.777,69.136 123.99,59.922 138.264,59.922 138.264,58.43 123.733,58.43 114.027,68.136 114.027,85.136 113.777,85.386 113.777,101.636 114.777,101.636
Bot:
  rectangle net N13V0: 113.872,24.205 114.105,25.349
  rectangle net N13V0: 112.214,23.095 114.105,25.349
  rectangle net P12V0: 148.717,61.055 150.022,62.37
  pour cut-out: 114.777,86.75 114.777,69.136 124.008,59.905 138.014,59.905 138.014,58.48 123.683,58.48 114.027,68.136 114.027,85.136 113.777,85.386 113.777,101.636 114.777,101.636
GP1(GND) (plane layer: these items are gaps in the copper):
  pour cut-out: 114.777,86.75 114.777,69.136 124.008,59.905 139.414,59.905 139.414,58.48 123.683,58.48 114.027,68.136 114.027,85.136 113.777,85.386 113.777,101.636 114.777,101.636
  lines w0.25: 40.068,0.25 40.068,4.75 42.068,4.75 44.318,2.5 122.068,2.5 122.068,0.25
  lines w0.5: 202.008,24.248 202.283,24.523 202.283,24.023

## Silkscreen, mask and mechanical layers (free items; w line width, h text height)
TopOverlay:
  drawing of 2476 lines, arcs and shapes, not listed
  text "WUT ISE 2021" at 31.513,130.212 h1.02
  text "EEM FMC Carrier v1.1" at 17.464,107.429 h1.5
  text "Sampler v2.3.1" at 102.089,97.28 h2.03
  text "WUT ISE 2022" at 104.814,95.63 h1.02
  text "CH0" at 36.939,89.805 h1.02
  text "on" at 43.027,80.447 h1.02
  text "off" at 33.527,80.197 h1.02
  text "CH1" at 37.689,79.805 h1.02
  text "Bot ADC0" at 10.764,74.93 h1.02 r90
  text "Up ADC1" at 12.264,74.93 h1.02 r90
  text "ADC IN" at 21.264,72.18 h1.02
  text "on" at 42.777,70.386 h1.02
  text "off" at 33.277,70.136 h1.02
  text "CH2" at 37.689,69.805 h1.02
  text "EEM 1" at 176.283,67.723 h1
  text "EEM 0" at 194.783,67.723 h1
  text "Termination" at 48.239,60.705 h1.02
  text "on" at 43.027,60.636 h1.02
  text "off" at 33.527,60.386 h1.02
  text "CH3" at 37.439,59.805 h1.02
  text "+12V" at 154.264,59.18 h1.02
  text "Bot ADC2" at 10.764,56.18 h1.02 r90
  text "Up ADC3" at 12.264,56.18 h1.02 r90
  text "EEM 1" at 141.914,55.805 h1.52 r90
  text "EEM 0" at 149.339,55.23 h1.52 r90
  text "+12V" at 109.764,53.43 h1 r90
  text "P3V3A" at 145.029,51.377 h1.02
  text "on" at 42.777,50.636 h1.02
  text "off" at 33.277,50.386 h1.02
  text "CH4" at 37.439,49.805 h1.02
  text "REF / VCC" at 108.014,48.21 h1
  text "on" at 41.777,40.636 h1.02
  text "off" at 33.764,40.43 h1.02
  text "CH5" at 37.439,39.805 h1.02
  text "Bot ADC4" at 10.764,38.93 h1.02 r90
  text "Up ADC5" at 12.264,38.93 h1.02 r90
  text "P2V5" at 118.264,38.18 h1
  text "N12VA" at 107.989,31.255 h1.02
  text "on" at 43.027,30.636 h1.02
  text "Termination" at 48.464,30.58 h1.02
  text "off" at 33.527,30.386 h1.02
  text "CH6" at 37.439,29.805 h1.02
  text "P6V0A" at 125.144,25.837 h1 r90
  text "Licensed under CERN-OHL-W v2 or later / https://ohwr.org/cernohl / https://github.com/sinara-hw/EEM_FMC_Carrier" at -11.699,24.888 h1.2 r90
  text "P5V0A" at 117.348,23.509 h1
  text "Bot ADC6" at 10.764,20.68 h1.02 r90
  text "Up ADC7" at 12.264,20.68 h1.02 r90
  text "on" at 43.027,20.636 h1.02
  text "off" at 33.527,20.386 h1.02
  text "CH7" at 37.689,19.805 h1.02
  text "P3V3 / MP1" at 174.611,18.852 h1
  text "SDA" at 190.614,17.223 h1
  text "SCL" at 190.614,15.374 h1
  text "GND" at 184.445,13.6 h1
  text "I2C0" at 195.063,13.556 h1 r90
  text "I2C1" at 176.572,10.398 h1 r90
  text "Designed by Pawel Kulik" at 38.57,9.05 h0.6
  text "SCL" at 172.221,7.825 h1 r90
  text "SDA" at 174.12,7.275 h1 r90
  text "P12V0" at 146.818,4.25 h1
  text "FPGA DONE" at 15.068,3.25 h1
BottomOverlay:
  drawing of 2471 lines, arcs and shapes, not listed
  text "WUT ISE 2021" at 31.455,128.889 h1.02
  text "EEM FMC Carrier v1.1" at 35.445,103.461 h1.5
  text "Sampler v2.3.1" at 129.014,7.43 h2.03
  text "WUT ISE 2021" at 122.027,3.453 h1.02
TopSolder:
  rectangle: 5.018,0.603 219.987,2.4
  rectangle: 3.368,0.603 5.545,2.375
  rectangle: 1.191,0.603 3.368,2.4
  region: 206.037,51.755 206.037,48.255 220,48.255 220,51.755
BottomSolder:
  rectangle: 4.937,0.603 219.987,2.4
  rectangle: 1.191,0.603 3.368,2.4
  rectangle: 3.368,0.603 5.545,2.375
  rectangle: 96.689,39.905 101.689,46.03
  region: 206.037,51.755 206.037,48.255 220,48.255 220,51.755